# EAGLE board CT_schematic (EAGLE 7.6.0)

Size 100 x 80 mm. Coordinates in mm from the lower left corner, seen from the top.
Outline: 0,0 100,0 100,80 0,80 0,0
Copper layers (1*16): Top 0.035mm / dielectric 1.5mm / Bottom 0.035mm
Design rules "default": minimum track width 10mil, minimum drill 24mil, track to track 8mil, track to pad 8mil, pad to pad 8mil, via to via 8mil, smd to smd 8mil, copper to edge 40mil, drill to drill 8mil, minimum pad ring 10mil, minimum via ring 8mil, stop-mask expansion 4mil, vias tented up to drill 0mil, thermal gap 10mil

## Footprints (pad centres in the part's own frame; a part is rotated, then mirrored left to right if it is on the bottom)
C0603 = smd 0.8 x 0.8: 1 -0.762,0; 2 0.762,0
C0402 = smd 0.5 x 0.5: 1 -0.508,0; 2 0.508,0
C1210 = smd 1.2 x 2.5: 1 -1.524,0; 2 1.524,0
C0805 = smd 1.2 x 1.3: 1 -1.016,0; 2 1.016,0
C1206 = smd 1.3 x 1.6: 1 -1.524,0; 2 1.524,0
L0603 = smd 0.8 x 0.8: 1 -0.762,0; 2 0.762,0
R0603 = smd 0.8 x 0.8: 1 -0.762,0; 2 0.762,0
LQFP48 = smd 0.3 x 1.2: 1 -2.75,-4.25; 2 -2.25,-4.25; 3 -1.75,-4.25; 4 -1.25,-4.25; 5 -0.75,-4.25; 6 -0.25,-4.25; 7 0.25,-4.25; 8 0.75,-4.25; 9 1.25,-4.25; 10 1.75,-4.25; 11 2.25,-4.25; 12 2.75,-4.25; 25 2.75,4.25; 26 2.25,4.25; 27 1.75,4.25; 28 1.25,4.25; 29 0.75,4.25; 30 0.25,4.25; 31 -0.25,4.25; 32 -0.75,4.25; 33 -1.25,4.25; 34 -1.75,4.25; 35 -2.25,4.25; 36 -2.75,4.25 | smd 1.2 x 0.3: 13 4.25,-2.75; 14 4.25,-2.25; 15 4.25,-1.75; 16 4.25,-1.25; 17 4.25,-0.75; 18 4.25,-0.25; 19 4.25,0.25; 20 4.25,0.75; 21 4.25,1.25; 22 4.25,1.75; 23 4.25,2.25; 24 4.25,2.75; 37 -4.25,2.75; 38 -4.25,2.25; 39 -4.25,1.75; 40 -4.25,1.25; 41 -4.25,0.75; 42 -4.25,0.25; 43 -4.25,-0.25; 44 -4.25,-0.75; 45 -4.25,-1.25; 46 -4.25,-1.75; 47 -4.25,-2.25; 48 -4.25,-2.75
TST-110-05-T-D-RA = drill 1 pad 1.7 square: 1 0,0 | drill 1 pad 1.7: 2 0,2.54; 3 2.54,0; 4 2.54,2.54; 5 5.08,0; 6 5.08,2.54; 7 7.62,0; 8 7.62,2.54; 9 10.16,0; 10 10.16,2.54; 11 12.7,0; 12 12.7,2.54; 13 15.24,0; 14 15.24,2.54; 15 17.78,0; 16 17.78,2.54; 17 20.32,0; 18 20.32,2.54; 19 22.86,0; 20 22.86,2.54
TDFN-8/6MM = smd 0.3 x 0.75: 1 0,0; 2 0.5,0; 3 1,0; 4 1.5,0; 5 1.5,3; 6 1,3; 7 0.5,3; 8 0,3
QFN-28 = smd 0.813 x 0.305: 1 -2.451,1.5; 2 -2.451,1; 3 -2.451,0.5; 4 -2.451,0; 5 -2.451,-0.5; 6 -2.451,-1; 7 -2.451,-1.5; 15 2.451,-1.5; 16 2.451,-1; 17 2.451,-0.5; 18 2.451,0; 19 2.451,0.5; 20 2.451,1; 21 2.451,1.5 | smd 0.305 x 0.813: 8 -1.5,-2.451; 9 -1,-2.451; 10 -0.5,-2.451; 11 0,-2.451; 12 0.5,-2.451; 13 1,-2.451; 14 1.5,-2.451; 22 1.5,2.451; 23 1,2.451; 24 0.5,2.451; 25 0,2.451; 26 -0.5,2.451; 27 -1,2.451; 28 -1.5,2.451 | smd 3.607 x 3.607: 29 0,0
SJ-43515TS-SMT-TR = smd 2.2 x 3: 1 0.6,-7.4; 4 3.4,-7.4 | smd 3 x 3: 2 12.8,-7.4; 5 17,-3 | smd 2 x 3: 3 5.3,0; 6 2.5,0 | drill 1.8: P$7 4.5,-3.69; P$8 11.54,-3.69
ABS07-32.768KHZ-7-T = smd 1.1 x 2.4: 1 -2.5,0; 2 0,0
ABLS-25.000MHZ-B2F-T = smd 5.6 x 2.8: 1 -3.81,0; 2 5.69,0
ASFL1 = smd 1.7 x 1.5: 1 -1.27,-1.1; 2 1.27,-1.1; 3 1.27,1.1; 4 -1.27,1.1
SOIC-8_EP = smd 1.6 x 0.533: 1 -2.921,1.905; 2 -2.921,0.635; 3 -2.921,-0.635; 4 -2.921,-1.905; 5 2.921,-1.905; 6 2.921,-0.635; 7 2.921,0.635; 8 2.921,1.905 | smd 2.54 x 3.302: EPAD 0,0 | drill 0.406 pad 0.406: P$1 -0.508,0.635; P$2 0.381,0.635; P$3 -0.508,-0.635; P$4 0.381,-0.635
DFN8_2X3MC = smd 0.813 x 0.305: 1 -1.398,0.75; 2 -1.398,0.25; 3 -1.398,-0.25; 4 -1.398,-0.75; 5 1.398,-0.75; 6 1.398,-0.25; 7 1.398,0.25; 8 1.398,0.75 | smd 1.753 x 1.549: 9 0,0
JST-2-SMD = smd 1 x 4.6: 1 -1,-3.7; 2 1,-3.7 | smd 1.6 x 3.4: NC1 -3.4,1.5; NC2 3.4,1.5
FCI_10118193-0001LF = smd 0.4 x 1.35: 1 -1.3,2.675; 2 -0.65,2.675; 3 0,2.675; 4 0.65,2.675; 5 1.3,2.675 | smd 1.6 x 1.4: 6 -3.2,2.45; 7 3.2,2.45 | smd 1.9 x 1.9: 8 -1.2,0; 9 1.2,0 | hole 0.5: -3.3,0; 3.3,0
SON-6 = smd 0.55 x 0.3: 1 -0.355,0.5 | smd 0.52 x 0.3: 2 -0.37,0; 3 -0.37,-0.5; 4 0.37,-0.5; 5 0.37,0; 6 0.37,0.5
SW_4-1437565-2 = smd 1.4 x 2.1: 1 -2.23,4.55; 2 -2.23,-4.55; 3 2.23,4.55; 4 2.23,-4.55
LGM67K-G1J2-24-Z = smd 0.8 x 1.4: A -2,0; C 0,0
NC7SZ125M5X = smd 1.3 x 0.7: 1 -1.3,0.95; 2 -1.3,0; 3 -1.3,-0.95; 4 1.3,-0.95; 5 1.3,0.95

## Placement (x,y rotation side)
C1  1e-07  [C0603]  -48.26,67.31 0 top  (outside the outline)
C2  1e-07  [C0603]  -52.07,67.31 0 top  (outside the outline)
C3  1e-07  [C0603]  -55.88,67.31 0 top  (outside the outline)
C4  1e-07  [C0603]  -59.69,67.31 0 top  (outside the outline)
C5  4.7e-06  [C0603]  -44.45,67.31 0 top  (outside the outline)
C6  1e-07  [C0603]  -63.5,67.31 0 top  (outside the outline)
C7  1e-07  [C0603]  -67.31,67.31 0 top  (outside the outline)
C8  1e-08  [C0603]  -71.12,67.31 0 top  (outside the outline)
C9  1e-06  [C0603]  -74.93,67.31 0 top  (outside the outline)
C10  1e-11  [C0402]  -53.34,72.39 0 top  (outside the outline)
C11  1e-11  [C0402]  -57.15,72.39 0 top  (outside the outline)
C12  1e-11  [C0402]  -60.96,72.39 0 top  (outside the outline)
C13  1e-11  [C0402]  -64.77,72.39 0 top  (outside the outline)
C14  1e-07  [C0402]  -68.58,72.39 0 top  (outside the outline)
C15  1e-08  [C0402]  -72.39,72.39 0 top  (outside the outline)
C16  2.2e-05  [C1210]  -66.04,48.26 0 top  (outside the outline)
C17  2.2e-05  [C1210]  -72.39,48.26 0 top  (outside the outline)
C18  1e-09  [C0402]  -15.24,77.47 0 top  (outside the outline)
C19  1e-09  [C0402]  -19.05,77.47 0 top  (outside the outline)
C20  1e-07  [C0402]  -22.86,77.47 0 top  (outside the outline)
C21  1e-07  [C0402]  -26.67,77.47 0 top  (outside the outline)
C22  1e-07  [C0402]  -30.48,77.47 0 top  (outside the outline)
C23  1e-07  [C0402]  -34.29,77.47 0 top  (outside the outline)
C24  1e-07  [C0402]  -38.1,77.47 0 top  (outside the outline)
C25  1e-05  [C0805]  -66.04,55.88 0 top  (outside the outline)
C26  1e-05  [C0805]  -71.12,55.88 0 top  (outside the outline)
C27  1e-05  [C0805]  -15.24,62.23 0 top  (outside the outline)
C28  1e-05  [C0805]  -20.32,62.23 0 top  (outside the outline)
C29  1e-05  [C0805]  -25.4,62.23 0 top  (outside the outline)
C30  1e-08  [C0402]  -41.91,77.47 0 top  (outside the outline)
C31  1e-05  [C1210]  -16.51,55.88 0 top  (outside the outline)
C32  1e-05  [C1210]  -22.86,55.88 0 top  (outside the outline)
C33  1e-05  [C1210]  -29.21,55.88 0 top  (outside the outline)
C34  1e-05  [C1210]  -35.56,55.88 0 top  (outside the outline)
C35  1e-07  [C0402]  -45.72,77.47 0 top  (outside the outline)
C36  1e-05  [C1206]  -41.91,55.88 0 top  (outside the outline)
C37  1e-05  [C1206]  -48.26,55.88 0 top  (outside the outline)
C38  1e-08  [C0402]  -49.53,77.47 0 top  (outside the outline)
C39  1e-08  [C0402]  -53.34,77.47 0 top  (outside the outline)
F1  240.0  [L0603]  -15.24,72.39 0 top  (outside the outline)
R1  10000.0  [R0603]  -49.53,62.23 0 top  (outside the outline)
R2  1000.0  [R0603]  -19.05,72.39 0 top  (outside the outline)
R3  1600.5  [R0603]  -22.86,72.39 0 top  (outside the outline)
R4  4700.0  [R0603]  -26.67,72.39 0 top  (outside the outline)
R5  2200.0  [R0603]  -30.48,72.39 0 top  (outside the outline)
R6  2200.0  [R0603]  -34.29,72.39 0 top  (outside the outline)
R7  10000.0  [R0603]  -54.61,62.23 0 top  (outside the outline)
R8  10000.0  [R0603]  -59.69,62.23 0 top  (outside the outline)
R9  10000.0  [R0603]  -64.77,62.23 0 top  (outside the outline)
R10  10000.0  [R0603]  -69.85,62.23 0 top  (outside the outline)
R11  10000.0  [R0603]  -74.93,62.23 0 top  (outside the outline)
R12  47000.0  [R0603]  -15.24,67.31 0 top  (outside the outline)
R13  47000.0  [R0603]  -20.32,67.31 0 top  (outside the outline)
R14  47000.0  [R0603]  -25.4,67.31 0 top  (outside the outline)
R15  680.0  [R0603]  -38.1,72.39 0 top  (outside the outline)
R16  4031.5447154472  [R0603]  -34.29,62.23 0 top  (outside the outline)
R17  2200.0  [R0603]  -41.91,72.39 0 top  (outside the outline)
R18  10000.0  [R0603]  -30.48,67.31 0 top  (outside the outline)
R19  10000.0  [R0603]  -35.56,67.31 0 top  (outside the outline)
R20  9100.0  [R0603]  -45.72,72.39 0 top  (outside the outline)
R21  680000.0  [R0603]  -39.37,62.23 0 top  (outside the outline)
R22  120000.0  [R0603]  -44.45,62.23 0 top  (outside the outline)
R23  2000.0  [R0603]  -49.53,72.39 0 top  (outside the outline)
R24  10000.0  [R0603]  -40.64,67.31 0 top  (outside the outline)
U1  STM32L051C8T3  [LQFP48]  -58.42,20.32 0 top  (outside the outline)
U2  TST-110-05-T-D-RA  [TST-110-05-T-D-RA]  -46.99,39.37 0 top  (outside the outline)
U3  24AA128T-I/MNY  [TDFN-8/6MM]  -25.4,31.75 0 top  (outside the outline)
U4  WM8731CLSEFL  [QFN-28]  -58.42,49.53 0 top  (outside the outline)
U5  SJ-43515TS-SMT-TR  [SJ-43515TS-SMT-TR]  -39.37,10.16 0 top  (outside the outline)
U6  SJ-43515TS-SMT-TR  [SJ-43515TS-SMT-TR]  -67.31,10.16 0 top  (outside the outline)
U7  ABS07-32.768KHZ-7-T  [ABS07-32.768KHZ-7-T]  -27.94,49.53 0 top  (outside the outline)
U8  ABLS-25.000MHZ-B2F-T  [ABLS-25.000MHZ-B2F-T]  -62.23,41.91 0 top  (outside the outline)
U9  ASFL1-12.288MHZ-EC-T  [ASFL1]  -45.72,31.75 0 top  (outside the outline)
U10  MIC5234YME  [SOIC-8_EP]  -36.83,48.26 0 top  (outside the outline)
U11  MCP73831T-2ACI/MC  [DFN8_2X3MC]  -62.23,76.2 0 top  (outside the outline)
U12  S2B-PH-SM4-TB(LF)(SN)  [JST-2-SMD]  -41.91,21.59 0 top  (outside the outline)
U13  10118193-0001LF  [FCI_10118193-0001LF]  -54.61,31.75 0 top  (outside the outline)
U14  TPS3895ADRYR  [SON-6]  -55.88,76.2 0 top  (outside the outline)
U15  4-1437565-2  [SW_4-1437565-2]  -27.94,21.59 0 top  (outside the outline)
U16  Q65110A2395  [LGM67K-G1J2-24-Z]  -45.72,49.53 0 top  (outside the outline)
U17  nc7sz125m5x  [NC7SZ125M5X]  -53.34,55.88 0 top  (outside the outline)
U18  nc7sz125m5x  [NC7SZ125M5X]  -59.69,55.88 0 top  (outside the outline)

## Library data of the parts
C1-C39 F1 R1-R24 U1-U18 = circuit_tree

## Nets
CLK_CRYSTAL_U1_3: C10.1 U1.3 U7.1
CLK_CRYSTAL_U1_4: C11.1 U1.4 U7.2
CLK_CRYSTAL_U1_5: C12.1 U1.5 U8.1
CLK_CRYSTAL_U1_6: C13.1 U1.6 U8.2
CLK_U4_1: U4.1 U9.3
GND: C1.2 C2.2 C3.2 C4.2 C5.2 C6.2 C7.2 C8.2 C9.2 C10.2 C11.2 C12.2 C13.2 C14.2 C15.2 C19.2 C20.2 C21.2 C22.2 C23.2 C24.2 C25.2 C26.2 C27.2 C28.2 C29.2 C30.2 C31.2 C32.2 C33.2 C34.2 C35.2 C36.2 C37.2 C38.2 C39.2 R2.2 R7.2 R9.2 R10.2 R12.2 R13.2 R14.2 R17.2 R20.2 R22.2 R23.2 U1.8 U1.23 U1.35 U1.47 U2.4 U2.6 U2.8 U2.10 U2.12 U2.14 U2.16 U2.18 U2.20 U3.4 U4.4 U4.15 U4.19 U4.25 U4.26 U4.29 U5.1 U6.1 U9.2 U10.7 U10.EPAD U11.6 U11.9 U12.2 U13.5 U13.6 U13.7 U13.8 U13.9 U14.2 U16.C U17.2 U17.3 U18.1 U18.3
INPUT_USBPOWER_5V: C36.1 R24.2 U11.1 U11.2 U13.1
NET_U1_7: R4.1 U1.7 U18.4
NET_U1_9: C8.1 C9.1 F1.1 U1.9
NET_U1_36: C6.1 C7.1 U1.36
NET_U1_42: R5.1 U1.42 U3.6
NET_U1_43: R6.1 U1.43 U3.5
NET_U1_44: R7.1 U1.44
NET_U1_45: R3.1 U1.45 U16.A
NET_U1_46: R1.1 U1.46 U15.3 U15.4
NET_U3_1: R9.1 U3.1
NET_U3_2: R10.1 U3.2
NET_U3_3: R11.1 U3.3
NET_U4_9: U4.9
NET_U4_20: C24.1 C29.1 U4.20
NET_U5_2: C17.1 R13.1 U5.2
NET_U5_5: C16.1 R12.1 U5.5
NET_U5_13: C16.2
NET_U5_14: C17.2
NET_U6_5: C18.1 C19.1 R14.1 R15.1 U6.5
NET_U6_21: R15.2
NET_U6_22: C18.2
NET_U10_4: R16.2 R17.1 U10.4
NET_U11_5: R24.1 U11.5
NET_U11_8: R23.1 U11.8
NET_U14_1: R19.1 R20.1 U14.1
NET_U14_3: R21.2 R22.1 U14.3
NET_U14_4: R18.1 U14.4 U17.4 U18.2
NET_U15_1: R2.1 U15.1 U15.2
PROC_I2S2_CK: U1.26 U4.7
PROC_I2S2_SD: U1.28 U4.8
PROC_I2S2_WS: U1.25 U4.9 U4.11
PROC_SYS_SWCLK: U1.37 U2.9
PROC_SYS_SWDIO: U1.34 U2.7
RST_OUT_U2_SRESET_B: R8.1 U2.15 U17.1
VCC_S1_3V7: C31.1 C32.1 C37.1 U10.5 U10.8 U11.3 U11.4 U12.1
VCC_TIER1_3V3: C1.1 C2.1 C3.1 C4.1 C5.1 C14.1 C15.1 C20.1 C21.1 C22.1 C23.1 C25.1 C26.1 C27.1 C28.1 C30.1 C33.1 C34.1 C35.1 C38.1 C39.1 F1.2 R1.2 R3.2 R4.2 R5.2 R6.2 R8.2 R11.2 R16.1 R18.2 R19.2 R21.1 U1.1 U1.24 U1.48 U2.1 U3.7 U3.8 U4.3 U4.5 U4.12 U4.18 U9.4 U10.1 U14.6 U17.5 U18.5

## Tracks (layer width: path | path; a pad name or v marks a point on that pad's centre or on a via)
CLK_CRYSTAL_U1_3  (2 unrouted)
CLK_CRYSTAL_U1_4  (2 unrouted)
CLK_CRYSTAL_U1_5  (2 unrouted)
CLK_CRYSTAL_U1_6  (2 unrouted)
CLK_U4_1  (1 unrouted)
GND  (85 unrouted)
INPUT_USBPOWER_5V  (4 unrouted)
NET_U1_7  (2 unrouted)
NET_U1_9  (3 unrouted)
NET_U1_36  (2 unrouted)
NET_U1_42  (2 unrouted)
NET_U1_43  (2 unrouted)
NET_U1_44  (1 unrouted)
NET_U1_45  (2 unrouted)
NET_U1_46  (3 unrouted)
NET_U3_1  (1 unrouted)
NET_U3_2  (1 unrouted)
NET_U3_3  (1 unrouted)
NET_U4_20  (2 unrouted)
NET_U5_2  (2 unrouted)
NET_U5_5  (2 unrouted)
NET_U6_5  (4 unrouted)
NET_U10_4  (2 unrouted)
NET_U11_5  (1 unrouted)
NET_U11_8  (1 unrouted)
NET_U14_1  (2 unrouted)
NET_U14_3  (2 unrouted)
NET_U14_4  (3 unrouted)
NET_U15_1  (2 unrouted)
PROC_I2S2_CK  (1 unrouted)
PROC_I2S2_SD  (1 unrouted)
PROC_I2S2_WS  (2 unrouted)
PROC_SYS_SWCLK  (1 unrouted)
PROC_SYS_SWDIO  (1 unrouted)
RST_OUT_U2_SRESET_B  (2 unrouted)
VCC_S1_3V7  (7 unrouted)
VCC_TIER1_3V3  (47 unrouted)